# Altium PCB PCB2(binary).PcbDoc (part 2 of 2)
Units mm, origin at the board's own origin, x right, y up, seen from the top; angles counter-clockwise.
Board outline 121.9 x 82.3 mm, 2 copper layers (Top Layer, Bottom Layer); 260 components, 214 nets, 701 pads, 54 vias.
Unrouted connection lines stored in the file: 53.
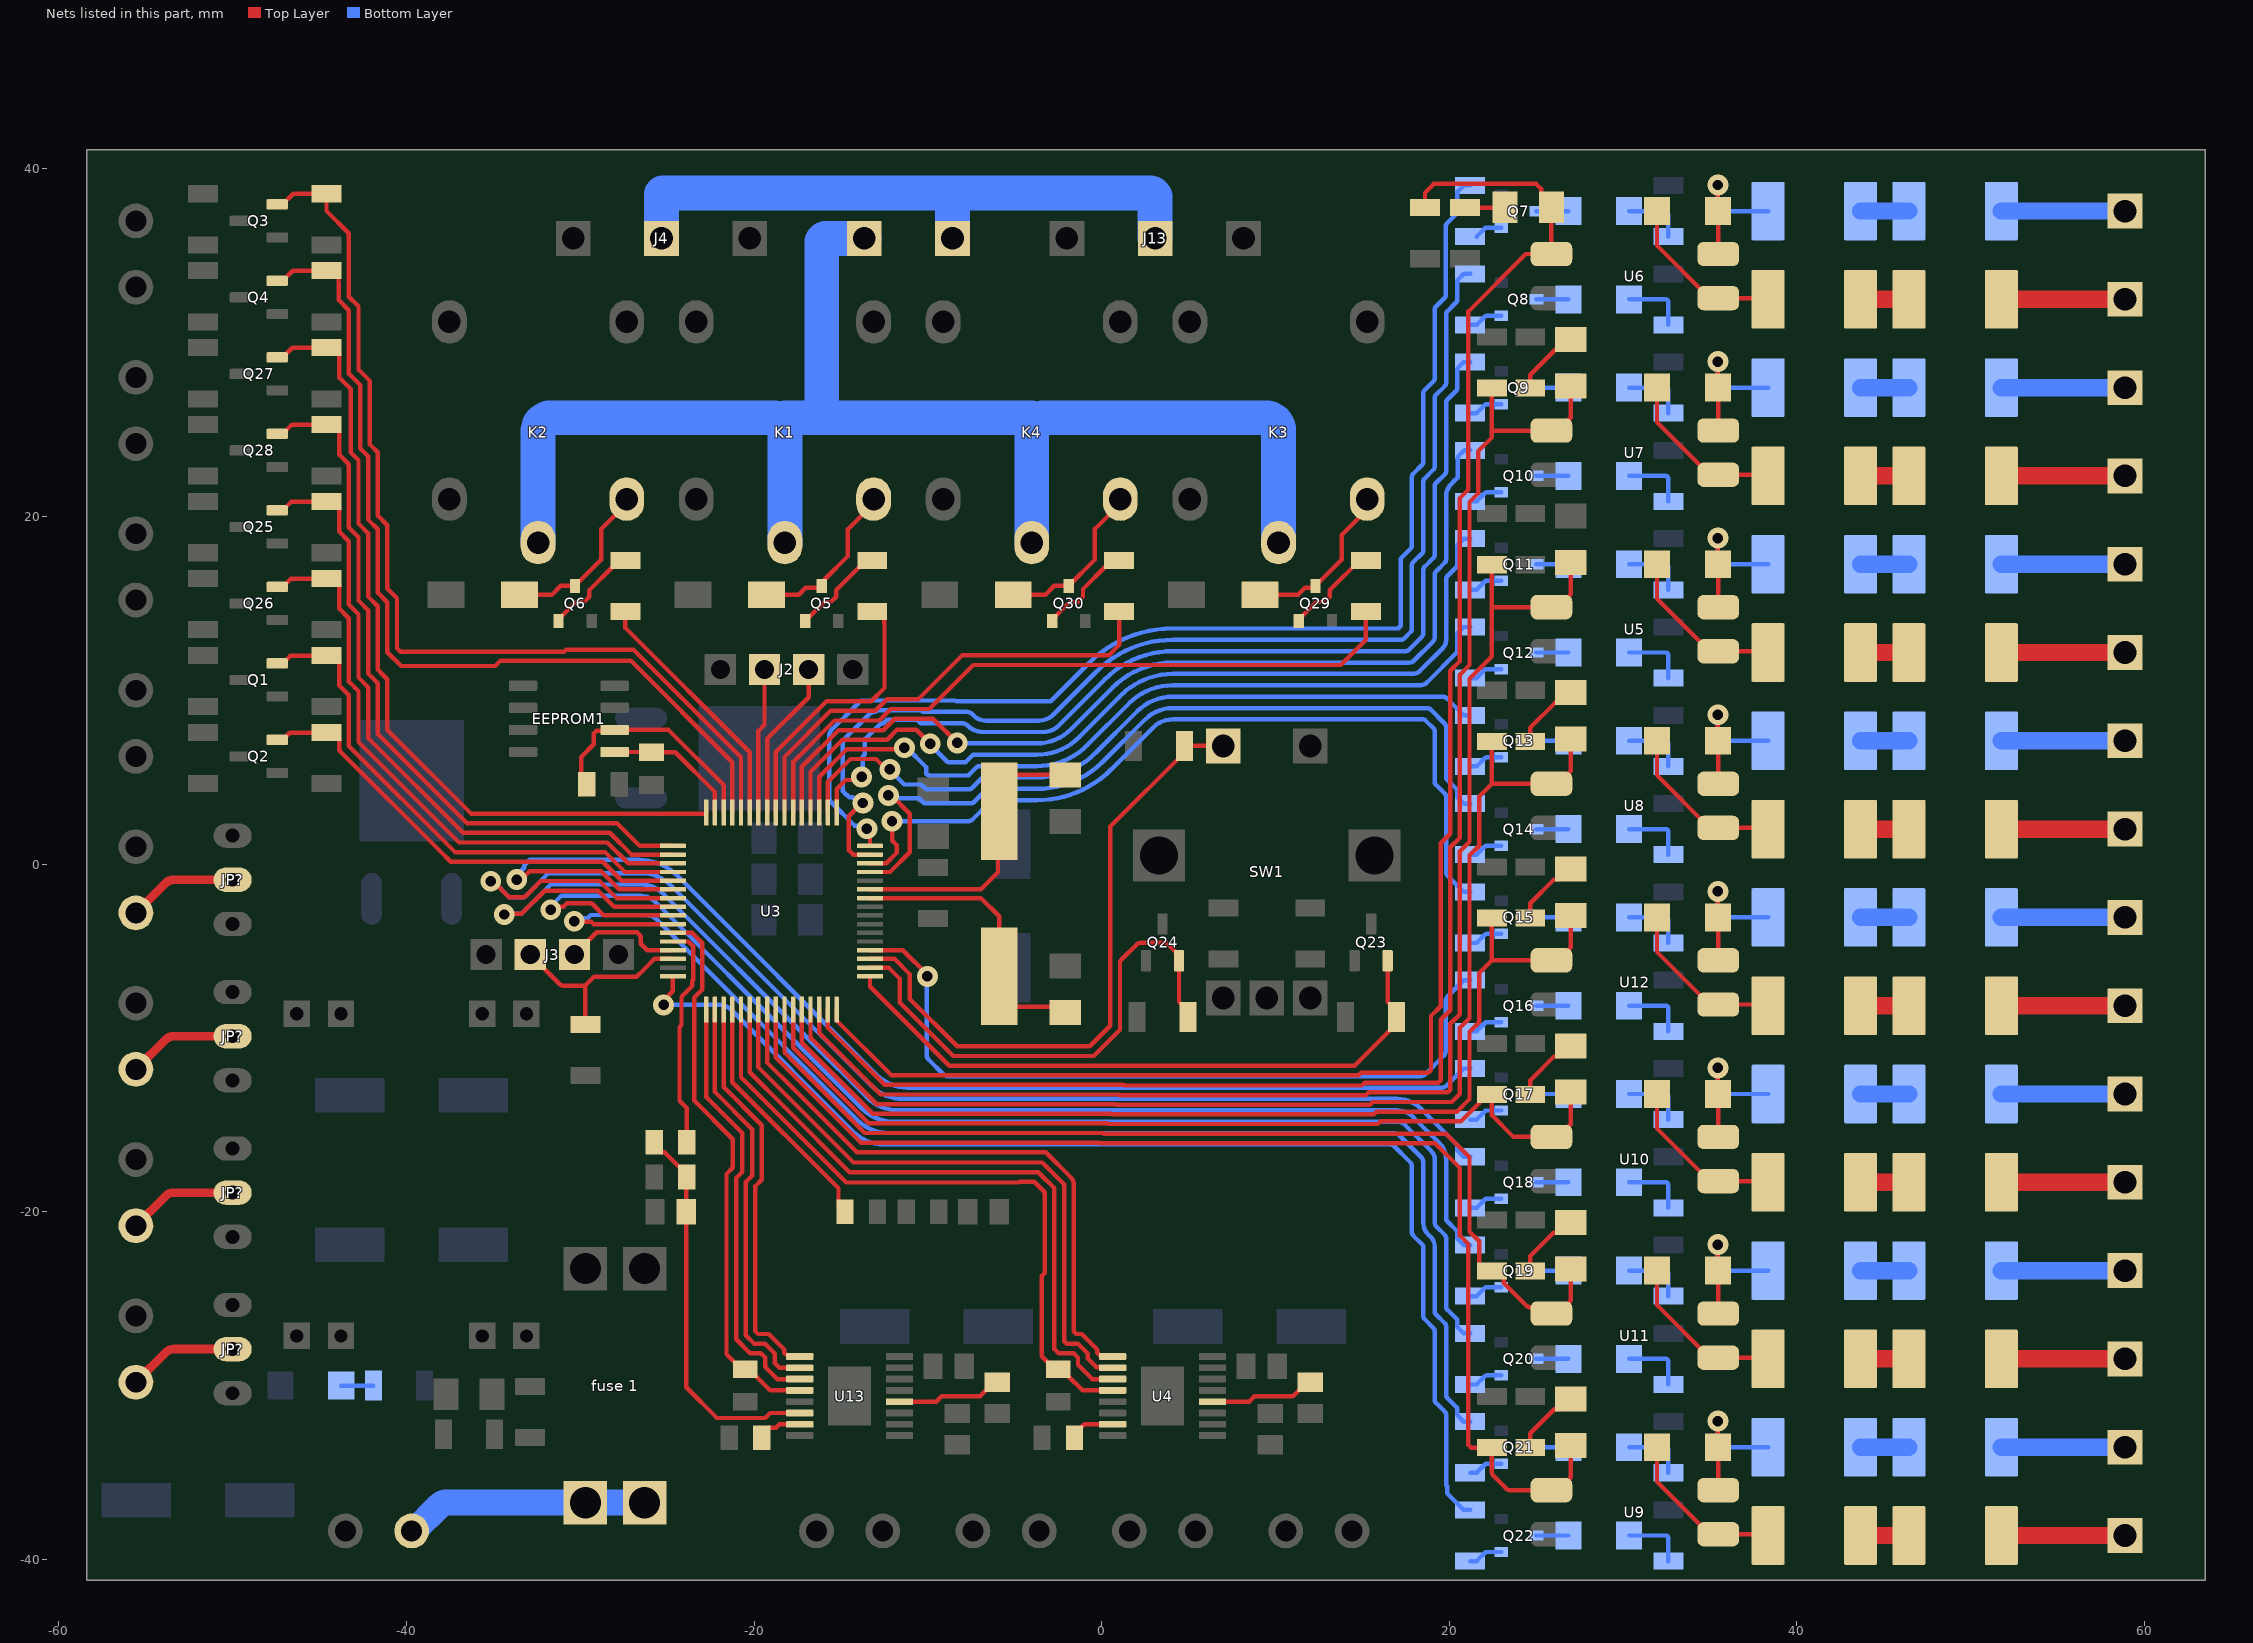
[diagram p2: the nets of this part, all layers, seen from the top]

## Via types
v1: diameter 1.2, hole 0.6, Top Layer to Bottom Layer, tented both sides, 50 vias
v2: diameter 1.2, hole 0.6, Top Layer to Bottom Layer, 4 vias

## Nets (pads, with @x,y where several pads share a name; then routed paths per layer and width w, separated by ;. In a path a pad name is that pad's centre, name@x,y a point inside that pad or via, vN(x,y) a via of type N, cw(c..) or ccw(c..) an arc to the next point about the centre after c; other vN are vias at no path point) (continued)
NetC17_2: C17.2 R67.2 U3.62 U5.3 | length 77.1
  Top Layer w0.254: U3.62@-16.25,-8.37 -16.25,-9.709 -12.706,-13.253 1.002,-13.253 1.036,-13.287 15.203,-13.287 15.36,-13.13 19.904,-13.13 20.055,-12.979 20.055,-9.189 20.609,-8.635 20.609,0.741 21.163,1.295 21.163,10.672 22.45,11.959 22.45,14.785 ; R67.2@22.45,17.225 22.45,14.785 ; C17.2@26.992,17.359 26.992,15.627 cw(c26.74,15.627) 26.918,15.449 26.328,14.859 cw(c26.15,15.037) 26.15,14.785 U5.3@25.875,14.785 22.45,14.785
NetC18_1: C18.1 R70.2 | length 2.3
  Top Layer w0.254: R70.2@20.9,37.77 23.17,37.77 C18.1@23.2,37.8
NetC18_2: C18.2 R68.2 U3.64 U6.3 | length 98.8
  Top Layer w0.254: U3.64@-15.25,-8.37 -15.25,-8.993 -12.098,-12.145 -9.005,-12.145 14.778,-12.145 14.918,-12.005 18.798,-12.005 18.947,-11.856 18.947,-8.73 19.501,-8.176 19.501,1.2 20.055,1.754 20.055,11.131 20.609,11.685 20.609,21.061 21.1,21.552 21.1,31.8 24.405,35.105 U6.3@25.875,35.105 25.875,37.797 C18.2@25.872,37.8 25.279,38.393 25.279,38.851 24.993,39.137 19.112,39.137 18.6,38.625 R68.2@18.6,37.77
NetC19_1: C19.1 R81.2 | length 3.9
  Top Layer w0.254: R81.2@24.656,27.385 24.656,28.156 26.098,29.598 26.399,29.598 C19.1@26.992,30.191
NetC19_2: C19.2 R79.2 U3.63 U7.3 | length 85.1
  Top Layer w0.254: U3.63@-15.75,-8.37 -15.75,-9.426 -12.477,-12.699 1.232,-12.699 1.266,-12.733 14.974,-12.733 15.131,-12.576 19.352,-12.576 19.501,-12.427 19.501,-8.96 20.055,-8.406 20.055,0.971 20.609,1.525 20.609,10.901 21.163,11.455 21.163,20.832 21.654,21.323 21.654,23.754 22.45,24.55 22.45,24.945 ; R79.2@22.45,27.385 22.45,24.945 ; U7.3@25.875,24.945 22.45,24.945 ; U7.3@26.254,24.945 26.992,25.683 C19.2@26.992,27.519
NetC20_1: C20.1 R82.2 | length 4
  Top Layer w0.254: R82.2@24.656,7.065 24.656,7.856 26.078,9.278 26.399,9.278 C20.1@26.992,9.871
NetC20_2: C20.2 R80.2 U3.61 U8.3 | length 68.6
  Top Layer w0.254: U3.61@-16.75,-8.37 -16.75,-9.993 -12.936,-13.807 0.773,-13.807 0.807,-13.841 15.433,-13.841 15.578,-13.696 cw(c15.607,-13.726) 15.607,-13.684 20.136,-13.684 20.609,-13.211 20.609,-9.419 21.163,-8.865 21.163,0.512 21.717,1.066 21.717,3.892 22.45,4.625 ; R80.2@22.45,7.065 22.45,4.625 ; C20.2@26.992,7.199 26.992,5.363 26.254,4.625 U8.3@25.875,4.625 22.45,4.625
NetC21_1: C21.1 R93.2 | length 4
  Top Layer w0.254: R93.2@24.656,-33.575 24.656,-32.744 26.038,-31.362 26.399,-31.362 C21.1@26.992,-30.769
NetC21_2: C21.2 R91.2 U3.57 U9.3 | length 70.8
  Top Layer w0.254: U3.57@-18.75,-8.37 -18.75,-11.126 -17.536,-12.341 -13.853,-16.023 -0.145,-16.023 -0.111,-16.057 19.182,-16.057 20.609,-17.484 20.609,-21.371 21.1,-21.862 21.1,-33.419 21.256,-33.575 22.331,-33.575 cw(c22.331,-33.694) 22.45,-33.694 22.45,-34.97 ccw(c22.763,-34.97) 22.542,-35.191 23.274,-35.923 ccw(c23.495,-35.702) 23.495,-36.015 U9.3@25.875,-36.015 26.15,-36.015 ccw(c26.15,-35.763) 26.328,-35.941 26.918,-35.351 ccw(c26.74,-35.173) 26.992,-35.173 C21.2@26.992,-33.441
NetC22_1: C22.1 R94.2 | length 4
  Top Layer w0.254: R94.2@24.656,-13.255 24.656,-12.444 26.058,-11.042 26.399,-11.042 C22.1@26.992,-10.449
NetC22_2: C22.2 R92.2 U3.59 U10.3 | length 53.4
  Top Layer w0.254: U3.59@-17.75,-8.37 -17.75,-10.559 -13.394,-14.915 0.314,-14.915 0.348,-14.949 15.892,-14.949 16.049,-14.792 20.672,-14.792 21.717,-13.747 21.717,-13.618 22.08,-13.255 R92.2@22.45,-13.255 22.45,-14.45 23.695,-15.695 26.254,-15.695 26.992,-14.957 C22.2@26.992,-13.121
NetC23_1: C23.1 R105.2 | length 4
  Top Layer w0.254: R105.2@24.656,-23.415 24.656,-22.544 25.998,-21.202 26.399,-21.202 C23.1@26.992,-20.609
NetC23_2: C23.2 R103.2 U3.58 U11.3 | length 59.5
  Top Layer w0.254: U3.58@-18.25,-8.37 -18.25,-10.843 -17.699,-11.394 -17.543,-11.55 -13.624,-15.469 0.084,-15.469 0.118,-15.503 19.803,-15.503 21.163,-16.863 21.163,-21.142 21.717,-21.696 21.717,-23.052 22.08,-23.415 22.777,-23.415 23.14,-23.778 23.14,-24.073 ccw(c23.219,-24.073) 23.164,-24.129 24.45,-25.415 ccw(c24.618,-25.247) 24.618,-25.485 25.452,-25.485 cw(c25.452,-25.611) 25.542,-25.522 25.848,-25.828 ccw(c25.913,-25.763) 25.913,-25.855 26.216,-25.855 ccw(c26.216,-25.763) 26.281,-25.828 26.918,-25.191 ccw(c26.74,-25.013) 26.992,-25.013 C23.2@26.992,-23.281
NetC24_1: C24.1 R106.2 | length 4
  Top Layer w0.254: R106.2@24.656,-3.095 24.656,-2.244 26.018,-0.882 26.399,-0.882 C24.1@26.992,-0.289
NetC24_2: C24.2 R104.2 U3.60 U12.3 | length 60
  Top Layer w0.254: U3.60@-17.25,-8.37 -17.25,-10.276 -13.165,-14.361 0.543,-14.361 0.577,-14.395 15.662,-14.395 15.819,-14.238 20.443,-14.238 21.163,-13.518 21.163,-9.648 21.717,-9.094 21.717,-6.268 22.45,-5.535 ; R104.2@22.45,-3.095 22.45,-5.535 ; C24.2@26.992,-2.961 26.992,-4.797 26.254,-5.535 U12.3@25.875,-5.535 22.45,-5.535
NetC25_2: C25.2 R111.1 R113.2 U13.6 | length 22.5
  Top Layer w0.254: R111.1@-25.735,-16 -25.735,-16.21 -25.362,-16.583 -25.152,-16.583 -24.318,-17.417 -24.238,-17.417 -23.865,-17.79 R113.2@-23.865,-18 -23.9,-18 C25.2@-23.9,-20 -23.9,-30.1 -22.137,-31.863 -19.363,-31.863 -19.075,-31.575 U13.6@-17.37,-31.575
NetD1_2: D1.2 R1.1 | length 1.9
  Bottom Layer w0.254: D1.2@-43.75,-30 R1.1@-41.9,-30
NetD2_A: D2.A K1.5 Q5.3 | length 9.6
  Top Layer w0.254: D2.A@-19.285,15.5 -17.431,15.5 -17.021,15.91 -16.2,15.91 -15.927,16.183 -15.927,16.398 -14.6,17.725 -14.6,19.275 -13.125,20.75 K1.5@-13.125,21
NetD3_A: D3.A K2.5 Q6.3 | length 9.6
  Top Layer w0.254: D3.A@-33.485,15.5 -31.631,15.5 -31.121,16.01 Q6.3@-30.3,16.01 -28.787,17.523 -28.787,19.288 -27.325,20.75 K2.5@-27.325,21
NetD4_1: D4.1 Q7.3 | length 1.8
  Bottom Layer w0.254: Q7.3@25.01,37.575 D4.1@26.85,37.575
NetD4_2: D4.2 R22.1 | length 3.6
  Bottom Layer w0.254: D4.2@30.35,37.575 32.382,37.575 cw(c32.382,37.51) 32.428,37.556 32.581,37.403 cw(c32.535,37.357) 32.6,37.357 R22.1@32.6,36.105
NetD5_1: D5.1 Q8.3 | length 1.8
  Bottom Layer w0.254: Q8.3@25.01,32.495 D5.1@26.85,32.495
NetD5_2: D5.2 R23.1 | length 3.7
  Bottom Layer w0.254: D5.2@30.35,32.495 32.453,32.495 cw(c32.453,32.348) 32.6,32.348 R23.1@32.6,31.025
NetD6_1: D6.1 Q9.3 | length 1.8
  Bottom Layer w0.254: Q9.3@25.01,27.415 D6.1@26.85,27.415
NetD6_2: D6.2 R24.1 | length 3.7
  Bottom Layer w0.254: D6.2@30.35,27.415 32.453,27.415 cw(c32.453,27.268) 32.6,27.268 R24.1@32.6,25.945
NetD7_1: D7.1 Q10.3 | length 1.8
  Bottom Layer w0.254: Q10.3@25.01,22.335 D7.1@26.85,22.335
NetD7_2: D7.2 R25.1 | length 3.7
  Bottom Layer w0.254: D7.2@30.35,22.335 32.453,22.335 cw(c32.453,22.188) 32.6,22.188 R25.1@32.6,20.865
NetD8_1: D8.1 Q11.3 | length 1.8
  Bottom Layer w0.254: Q11.3@25.01,17.255 D8.1@26.85,17.255
NetD8_2: D8.2 R26.1 | length 3.7
  Bottom Layer w0.254: D8.2@30.35,17.255 32.453,17.255 cw(c32.453,17.108) 32.6,17.108 R26.1@32.6,15.785
NetD9_1: D9.1 Q12.3 | length 1.8
  Bottom Layer w0.254: Q12.3@25.01,12.175 D9.1@26.85,12.175
NetD9_2: D9.2 R27.1 | length 3.7
  Bottom Layer w0.254: D9.2@30.35,12.175 32.453,12.175 cw(c32.453,12.028) 32.6,12.028 R27.1@32.6,10.705
NetD10_1: D10.1 Q13.3 | length 1.8
  Bottom Layer w0.254: Q13.3@25.01,7.095 D10.1@26.85,7.095
NetD10_2: D10.2 R28.1 | length 3.7
  Bottom Layer w0.254: D10.2@30.35,7.095 32.453,7.095 cw(c32.453,6.948) 32.6,6.948 R28.1@32.6,5.625
NetD11_1: D11.1 Q14.3 | length 1.8
  Bottom Layer w0.254: Q14.3@25.01,2.015 D11.1@26.85,2.015
NetD11_2: D11.2 R29.1 | length 3.7
  Bottom Layer w0.254: D11.2@30.35,2.015 32.453,2.015 cw(c32.453,1.868) 32.6,1.868 R29.1@32.6,0.545
NetD12_1: D12.1 Q15.3 | length 1.8
  Bottom Layer w0.254: Q15.3@25.01,-3.065 D12.1@26.85,-3.065
NetD12_2: D12.2 R38.1 | length 3.7
  Bottom Layer w0.254: D12.2@30.35,-3.065 32.453,-3.065 cw(c32.453,-3.212) 32.6,-3.212 R38.1@32.6,-4.535
NetD13_1: D13.1 Q16.3 | length 1.8
  Bottom Layer w0.254: Q16.3@25.01,-8.145 D13.1@26.85,-8.145
NetD13_2: D13.2 R39.1 | length 3.7
  Bottom Layer w0.254: D13.2@30.35,-8.145 32.453,-8.145 cw(c32.453,-8.292) 32.6,-8.292 R39.1@32.6,-9.615
NetD14_1: D14.1 Q17.3 | length 1.8
  Bottom Layer w0.254: Q17.3@25.01,-13.225 D14.1@26.85,-13.225
NetD14_2: D14.2 R40.1 | length 3.7
  Bottom Layer w0.254: D14.2@30.35,-13.225 32.453,-13.225 cw(c32.453,-13.372) 32.6,-13.372 R40.1@32.6,-14.695
NetD15_1: D15.1 Q18.3 | length 1.8
  Bottom Layer w0.254: Q18.3@25.01,-18.305 D15.1@26.85,-18.305
NetD15_2: D15.2 R41.1 | length 3.7
  Bottom Layer w0.254: D15.2@30.35,-18.305 32.453,-18.305 cw(c32.453,-18.452) 32.6,-18.452 R41.1@32.6,-19.775
NetD16_1: D16.1 Q19.3 | length 1.8
  Bottom Layer w0.254: Q19.3@25.01,-23.385 D16.1@26.85,-23.385
NetD16_2: D16.2 R42.1 | length 3.7
  Bottom Layer w0.254: D16.2@30.35,-23.385 32.453,-23.385 cw(c32.453,-23.532) 32.6,-23.532 R42.1@32.6,-24.855
NetD17_1: D17.1 Q20.3 | length 1.8
  Bottom Layer w0.254: Q20.3@25.01,-28.465 D17.1@26.85,-28.465
NetD17_2: D17.2 R43.1 | length 3.7
  Bottom Layer w0.254: D17.2@30.35,-28.465 32.453,-28.465 cw(c32.453,-28.612) 32.6,-28.612 R43.1@32.6,-29.935
NetD18_1: D18.1 Q21.3 | length 1.8
  Bottom Layer w0.254: Q21.3@25.01,-33.545 D18.1@26.85,-33.545
NetD18_2: D18.2 R44.1 | length 3.7
  Bottom Layer w0.254: D18.2@30.35,-33.545 32.453,-33.545 cw(c32.453,-33.692) 32.6,-33.692 R44.1@32.6,-35.015
NetD19_1: D19.1 Q22.3 | length 1.8
  Bottom Layer w0.254: Q22.3@25.01,-38.625 D19.1@26.85,-38.625
NetD19_2: D19.2 R45.1 | length 3.7
  Bottom Layer w0.254: D19.2@30.35,-38.625 32.453,-38.625 cw(c32.453,-38.772) 32.6,-38.772 R45.1@32.6,-40.095
NetD20_1: D20.1 R60.2 U5.1 | length 9.7
  Top Layer w0.254: D20.1@31.95,17.255 31.95,15.27 34.975,12.245 U5.1@35.475,12.245 38.27,12.245 R60.2@38.34,12.175
NetD20_2: D20.2 R64.2 U5.2 | length 8.3
  Top Layer w0.254: v1(35.45,18.755) D20.2@35.45,17.255 35.475,17.23 U5.2@35.475,14.785
  Bottom Layer w0.254: v1(35.45,18.755) 35.45,17.405 ccw(c35.6,17.405) 35.6,17.255 R64.2@38.34,17.255
NetD21_1: D21.1 R62.2 U6.1 | length 9.7
  Top Layer w0.254: D21.1@31.95,37.575 31.95,35.59 34.975,32.565 U6.1@35.475,32.565 38.27,32.565 R62.2@38.34,32.495
NetD21_2: D21.2 R66.2 U6.2 | length 8.3
  Top Layer w0.254: v1(35.45,39.075) D21.2@35.45,37.575 35.475,37.55 U6.2@35.475,35.105
  Bottom Layer w0.254: v1(35.45,39.075) 35.45,37.725 ccw(c35.6,37.725) 35.6,37.575 R66.2@38.34,37.575
NetD22_1: D22.1 R72.2 U7.1 | length 9.7
  Top Layer w0.254: D22.1@31.95,27.415 31.95,25.43 34.975,22.405 U7.1@35.475,22.405 38.27,22.405 R72.2@38.34,22.335
NetD22_2: D22.2 R76.2 U7.2 | length 8.3
  Top Layer w0.254: v1(35.45,28.915) D22.2@35.45,27.415 35.475,27.39 U7.2@35.475,24.945
  Bottom Layer w0.254: v1(35.45,28.915) 35.45,27.565 ccw(c35.6,27.565) 35.6,27.415 R76.2@38.34,27.415
NetD23_1: D23.1 R74.2 U8.1 | length 9.7
  Top Layer w0.254: D23.1@31.95,7.095 31.95,5.11 34.975,2.085 U8.1@35.475,2.085 38.27,2.085 R74.2@38.34,2.015
NetD23_2: D23.2 R78.2 U8.2 | length 8.3
  Top Layer w0.254: v1(35.45,8.595) D23.2@35.45,7.095 35.475,7.07 U8.2@35.475,4.625
  Bottom Layer w0.254: v1(35.45,8.595) 35.45,7.245 ccw(c35.6,7.245) 35.6,7.095 R78.2@38.34,7.095
NetD24_1: D24.1 R84.2 U9.1 | length 9.7
  Top Layer w0.254: D24.1@31.95,-33.545 31.95,-35.53 34.975,-38.555 U9.1@35.475,-38.555 38.27,-38.555 R84.2@38.34,-38.625
NetD24_2: D24.2 R88.2 U9.2 | length 8.3
  Top Layer w0.254: v1(35.45,-32.045) D24.2@35.45,-33.545 35.475,-33.57 U9.2@35.475,-36.015
  Bottom Layer w0.254: v1(35.45,-32.045) 35.45,-33.395 ccw(c35.6,-33.395) 35.6,-33.545 R88.2@38.34,-33.545
NetD25_1: D25.1 R86.2 U10.1 | length 9.7
  Top Layer w0.254: D25.1@31.95,-13.225 31.95,-15.21 34.975,-18.235 U10.1@35.475,-18.235 38.27,-18.235 R86.2@38.34,-18.305
NetD25_2: D25.2 R90.2 U10.2 | length 8.3
  Top Layer w0.254: v1(35.45,-11.725) D25.2@35.45,-13.225 35.475,-13.25 U10.2@35.475,-15.695
  Bottom Layer w0.254: v1(35.45,-11.725) 35.45,-13.075 ccw(c35.6,-13.075) 35.6,-13.225 R90.2@38.34,-13.225
NetD26_1: D26.1 R96.2 U11.1 | length 9.7
  Top Layer w0.254: D26.1@31.95,-23.385 31.95,-25.37 34.975,-28.395 U11.1@35.475,-28.395 38.27,-28.395 R96.2@38.34,-28.465
NetD26_2: D26.2 R100.2 U11.2 | length 8.3
  Top Layer w0.254: v1(35.45,-21.885) D26.2@35.45,-23.385 35.475,-23.41 U11.2@35.475,-25.855
  Bottom Layer w0.254: v1(35.45,-21.885) 35.45,-23.235 ccw(c35.6,-23.235) 35.6,-23.385 R100.2@38.34,-23.385
NetD27_1: D27.1 R98.2 U12.1 | length 9.7
  Top Layer w0.254: D27.1@31.95,-3.065 31.95,-5.05 34.975,-8.075 U12.1@35.475,-8.075 38.27,-8.075 R98.2@38.34,-8.145
NetD27_2: D27.2 R102.2 U12.2 | length 8.3
  Top Layer w0.254: v1(35.45,-1.565) D27.2@35.45,-3.065 35.475,-3.09 U12.2@35.475,-5.535
  Bottom Layer w0.254: v1(35.45,-1.565) 35.45,-2.915 ccw(c35.6,-2.915) 35.6,-3.065 R102.2@38.34,-3.065
NetD28_A: D28.A K3.5 Q29.3 | length 9.6
  Top Layer w0.254: D28.A@9.115,15.5 11.3,15.5 11.71,15.91 12.2,15.91 13.813,17.523 13.813,18.941 15.275,20.403 K3.5@15.275,21
NetD29_A: D29.A K4.5 Q30.3 | length 9.6
  Top Layer w0.254: D29.A@-5.085,15.5 -3.231,15.5 -2.721,16.01 Q30.3@-1.9,16.01 -0.387,17.523 -0.387,19.288 1.075,20.75 K4.5@1.075,21
"Netfuse 1_1": "fuse 1.1" P1.2 | length 14
  Bottom Layer w1.5: P1.2@-39.7,-38.365 -39.578,-38.365 ccw(c-39.578,-38.332) -39.555,-38.355 -38.098,-36.898 cw(c-37.704,-37.292) -37.704,-36.735 -29.7,-36.735 -26.3,-36.735
NetJ1_1: J1.1 K1.1 K2.1 K3.1 K4.1 | length 82.6
  Bottom Layer w2: K2.1@-32.425,18.5 -32.425,24.961 cw(c-31.707,24.961) -31.707,25.679 -18.943,25.679 cw(c-18.943,24.961) -18.225,24.961 K1.1@-18.225,18.5 ; -18.225,25.679 -16.316,25.679 ccw(c-16.316,25.892) -16.104,25.892 -16.104,35.756 cw(c-15.86,35.756) -15.86,36 J1.1@-13.665,36 ; -16.104,25.679 -4.025,25.679 ; K4.1@-4.025,18.5 -4.025,24.961 cw(c-3.307,24.961) -3.307,25.679 9.457,25.679 cw(c9.457,24.961) 10.175,24.961 K3.1@10.175,18.5
NetJ1_2: J1.2 J4.02 J13.02 | length 36
  Bottom Layer w2: J4.02@-25.325,36 -25.325,38.541 cw(c-25.305,38.541) -25.319,38.555 -25.272,38.602 cw(c-25.258,38.588) -25.258,38.608 -8.585,38.608 ; J1.2@-8.585,36 -8.585,38.347 cw(c-8.324,38.347) -8.324,38.608 2.814,38.608 cw(c2.814,38.347) 3.075,38.347 J13.02@3.075,36
NetJ5_1: J5.1 R63.1 | length 7.1
  Bottom Layer w1: R63.1@51.76,17.255 J5.1@58.875,17.255
NetJ5_2: J5.2 R59.1 | length 7.1
  Top Layer w1: R59.1@51.76,12.175 J5.2@58.875,12.175
NetJ6_1: J6.1 R65.1 | length 7.1
  Bottom Layer w1: R65.1@51.76,37.575 J6.1@58.875,37.575
NetJ6_2: J6.2 R61.1 | length 7.1
  Top Layer w1: R61.1@51.76,32.495 J6.2@58.875,32.495
NetJ7_1: J7.1 R75.1 | length 7.1
  Bottom Layer w1: R75.1@51.76,27.415 J7.1@58.875,27.415
NetJ7_2: J7.2 R71.1 | length 7.1
  Top Layer w1: R71.1@51.76,22.335 J7.2@58.875,22.335
NetJ8_1: J8.1 R77.1 | length 7.1
  Bottom Layer w1: R77.1@51.76,7.095 J8.1@58.875,7.095
NetJ8_2: J8.2 R73.1 | length 7.1
  Top Layer w1: R73.1@51.76,2.015 J8.2@58.875,2.015
NetJ9_1: J9.1 R87.1 | length 7.1
  Bottom Layer w1: R87.1@51.76,-33.545 J9.1@58.875,-33.545
NetJ9_2: J9.2 R83.1 | length 7.1
  Top Layer w1: R83.1@51.76,-38.625 J9.2@58.875,-38.625
NetJ10_1: J10.1 R89.1 | length 7.1
  Bottom Layer w1: R89.1@51.76,-13.225 J10.1@58.875,-13.225
NetJ10_2: J10.2 R85.1 | length 7.1
  Top Layer w1: R85.1@51.76,-18.305 J10.2@58.875,-18.305
NetJ11_1: J11.1 R99.1 | length 7.1
  Bottom Layer w1: R99.1@51.76,-23.385 J11.1@58.875,-23.385
NetJ11_2: J11.2 R95.1 | length 7.1
  Top Layer w1: R95.1@51.76,-28.465 J11.2@58.875,-28.465
NetJ12_1: J12.1 R101.1 | length 7.1
  Bottom Layer w1: R101.1@51.76,-3.065 J12.1@58.875,-3.065
NetJ12_2: J12.2 R97.1 | length 7.1
  Top Layer w1: R97.1@51.76,-8.145 J12.2@58.875,-8.145
NetQ1_2: Q1.2 R10.1 U3.36 | length 30.4
  Top Layer w0.254: Q1.2@-47.44,11.546 -47.156,11.546 ccw(c-47.156,11.622) -47.103,11.569 -46.718,11.953 cw(c-46.609,11.844) -46.609,11.999 R10.1@-44.766,11.999 ; R10.1@-44.6,11.999 -44.23,11.999 -43.867,11.636 -43.867,10.279 -43.516,9.928 -43.313,9.725 -43.313,6.804 -37.202,0.693 -28.574,0.693 -27.431,-0.45 U3.36@-24.67,-0.45
NetQ2_2: Q2.2 R11.1 U3.37 | length 26.8
  Top Layer w0.254: Q2.2@-47.44,7.145 -47.156,7.145 ccw(c-47.156,7.221) -47.103,7.167 -46.742,7.527 cw(c-46.64,7.425) -46.64,7.57 -44.23,7.57 -43.867,7.207 -43.867,6.615 ccw(c-43.708,6.615) -43.821,6.503 -38.075,0.758 -37.456,0.139 -28.708,0.139 -27.619,-0.95 U3.37@-24.67,-0.95
NetQ3_2: Q3.2 R18.1 U3.28 | length 56.4
  Top Layer w0.254: Q3.2@-47.44,37.955 -47.156,37.955 ccw(c-47.156,38.031) -47.103,37.977 -46.571,38.508 cw(c-46.423,38.36) -46.423,38.57 R18.1@-44.791,38.57 ; R18.1@-44.6,38.57 -44.6,37.584 -43.313,36.297 -43.313,32.652 -42.759,32.098 -42.759,28.453 -42.1,27.794 -42.1,24.149 -41.651,23.7 -41.651,20.054 -41.097,19.5 -41.097,15.855 -40.543,15.301 -40.543,12.422 -40.34,12.219 -30.937,12.219 -30.818,12.338 -26.937,12.338 -20.75,6.151 U3.28@-20.75,2.97
NetQ4_2: Q4.2 R19.1 U3.29 | length 52.3
  Top Layer w0.254: Q4.2@-47.44,33.554 -47.156,33.554 ccw(c-47.156,33.63) -47.103,33.576 -46.596,34.083 cw(c-46.454,33.941) -46.454,34.141 -44.273,34.141 -43.91,33.778 -43.91,33.451 -43.9,33.441 -43.9,32.455 -43.313,31.868 -43.313,28.223 -42.654,27.564 -42.654,23.919 -42.205,23.47 -42.205,19.825 -41.651,19.271 -41.651,15.626 -41.097,15.072 -41.097,12.192 -40.305,11.4 -34.896,11.4 -34.585,11.711 -27.094,11.711 -21.25,5.867 U3.29@-21.25,2.97
NetQ5_1: Q5.1 R20.1 | length 5.6
  Top Layer w0.254: Q5.1@-17.05,13.99 -17.05,14.09 -16.877,14.263 -16.777,14.263 -15.957,15.083 -15.582,15.083 -15.273,15.392 -15.273,15.767 -13.57,17.47 R20.1@-13.2,17.47
NetQ6_1: Q6.1 R21.1 | length 5.5
  Top Layer w0.254: Q6.1@-31.236,14.104 -30.257,15.083 -29.782,15.083 -29.473,15.392 -29.473,15.767 -28.133,17.107 -27.77,17.47 R21.1@-27.4,17.47
NetQ7_1: Q7.1 R30.1 | length 1.6
  Bottom Layer w0.254: R30.1@21.57,36.105 22.038,36.573 cw(c22.164,36.447) 22.164,36.625 Q7.1@22.99,36.625
NetQ8_1: Q8.1 R31.1 | length 2
  Bottom Layer w0.254: R31.1@21.2,31.025 21.533,31.025 ccw(c21.533,31.114) 21.596,31.051 22.038,31.493 cw(c22.164,31.367) 22.164,31.545 Q8.1@22.99,31.545
NetQ9_1: Q9.1 R32.1 | length 2
  Bottom Layer w0.254: R32.1@21.2,25.945 21.533,25.945 ccw(c21.533,26.034) 21.596,25.971 22.038,26.413 cw(c22.164,26.287) 22.164,26.465 Q9.1@22.99,26.465
NetQ10_1: Q10.1 R33.1 | length 2
  Bottom Layer w0.254: R33.1@21.2,20.865 21.533,20.865 ccw(c21.533,20.954) 21.596,20.891 22.038,21.333 cw(c22.164,21.207) 22.164,21.385 Q10.1@22.99,21.385
NetQ11_1: Q11.1 R34.1 | length 2
  Bottom Layer w0.254: R34.1@21.2,15.785 21.533,15.785 ccw(c21.533,15.874) 21.596,15.811 22.038,16.253 cw(c22.164,16.127) 22.164,16.305 Q11.1@22.99,16.305
NetQ12_1: Q12.1 R35.1 | length 2
  Bottom Layer w0.254: R35.1@21.2,10.705 21.533,10.705 ccw(c21.533,10.794) 21.596,10.731 22.038,11.173 cw(c22.164,11.047) 22.164,11.225 Q12.1@22.99,11.225
NetQ13_1: Q13.1 R36.1 | length 2
  Bottom Layer w0.254: R36.1@21.2,5.625 21.533,5.625 ccw(c21.533,5.714) 21.596,5.651 22.038,6.093 cw(c22.164,5.967) 22.164,6.145 Q13.1@22.99,6.145
NetQ14_1: Q14.1 R37.1 | length 2
  Bottom Layer w0.254: R37.1@21.2,0.545 21.533,0.545 ccw(c21.533,0.634) 21.596,0.571 22.038,1.013 cw(c22.164,0.887) 22.164,1.065 Q14.1@22.99,1.065
NetQ15_1: Q15.1 R46.1 | length 2
  Bottom Layer w0.254: R46.1@21.2,-4.535 21.533,-4.535 ccw(c21.533,-4.446) 21.596,-4.509 22.038,-4.067 cw(c22.164,-4.193) 22.164,-4.015 Q15.1@22.99,-4.015
NetQ16_1: Q16.1 R47.1 | length 2
  Bottom Layer w0.254: R47.1@21.2,-9.615 21.533,-9.615 ccw(c21.533,-9.526) 21.596,-9.589 22.038,-9.147 cw(c22.164,-9.273) 22.164,-9.095 Q16.1@22.99,-9.095
NetQ17_1: Q17.1 R48.1 | length 2
  Bottom Layer w0.254: R48.1@21.2,-14.695 21.533,-14.695 ccw(c21.533,-14.606) 21.596,-14.669 22.038,-14.227 cw(c22.164,-14.353) 22.164,-14.175 Q17.1@22.99,-14.175
NetQ18_1: Q18.1 R49.1 | length 2
  Bottom Layer w0.254: R49.1@21.2,-19.775 21.533,-19.775 ccw(c21.533,-19.686) 21.596,-19.749 22.038,-19.307 cw(c22.164,-19.433) 22.164,-19.255 Q18.1@22.99,-19.255
NetQ19_1: Q19.1 R50.1 | length 2
  Bottom Layer w0.254: R50.1@21.2,-24.855 21.533,-24.855 ccw(c21.533,-24.766) 21.596,-24.829 22.038,-24.387 cw(c22.164,-24.513) 22.164,-24.335 Q19.1@22.99,-24.335
NetQ20_1: Q20.1 R51.1 | length 2
  Bottom Layer w0.254: R51.1@21.2,-29.935 21.533,-29.935 ccw(c21.533,-29.846) 21.596,-29.909 22.038,-29.467 cw(c22.164,-29.593) 22.164,-29.415 Q20.1@22.99,-29.415
NetQ21_1: Q21.1 R52.1 | length 2
  Bottom Layer w0.254: R52.1@21.2,-35.015 21.533,-35.015 ccw(c21.533,-34.926) 21.596,-34.989 22.038,-34.547 cw(c22.164,-34.673) 22.164,-34.495 Q21.1@22.99,-34.495
NetQ22_1: Q22.1 R53.1 | length 2
  Bottom Layer w0.254: R53.1@21.2,-40.095 21.533,-40.095 ccw(c21.533,-40.006) 21.596,-40.069 22.038,-39.627 cw(c22.164,-39.753) 22.164,-39.575 Q22.1@22.99,-39.575
NetQ23_2: Q23.2 R57.2 U3.1 | length 37.2
  Top Layer w0.254: U3.1@-13.33,-6.45 -13.33,-7.037 -13.31,-7.057 -8.776,-11.591 14.549,-11.591 16.97,-9.17 R57.2@16.97,-8.8 ; Q23.2@16.45,-5.56 16.45,-7.91 R57.2@16.97,-8.43
NetQ24_2: Q24.2 R58.1 U3.2 | length 29.7
  Top Layer w0.254: U3.2@-13.33,-5.95 -12.262,-5.95 -11.608,-6.604 -11.608,-7.976 -8.546,-11.037 -0.452,-11.037 1.054,-9.531 1.054,-5.581 1.16,-5.475 2.011,-4.624 cw(c2.267,-4.881) 2.267,-4.518 3.62,-4.518 cw(c3.62,-4.766) 3.796,-4.591 4.45,-5.245 4.45,-7.91 4.97,-8.43 R58.1@4.97,-8.8
NetQ25_2: Q25.2 R109.1 U3.34 | length 38.1
  Top Layer w0.254: Q25.2@-47.44,20.349 -47.156,20.349 ccw(c-47.156,20.425) -47.103,20.372 -46.669,20.805 cw(c-46.547,20.683) -46.547,20.856 R109.1@-44.705,20.856 ; R109.1@-44.6,20.856 -44.23,20.856 -43.867,20.493 -43.867,19.137 -43.313,18.583 -43.313,14.937 -42.759,14.383 -42.759,10.738 -42.408,10.387 -42.205,10.184 -42.205,7.262 -36.744,1.801 -28.305,1.801 -27.055,0.55 U3.34@-24.67,0.55
NetQ26_2: Q26.2 R110.1 U3.35 | length 34.4
  Top Layer w0.254: Q26.2@-47.44,15.948 -47.125,15.948 -46.646,16.427 -44.23,16.427 -43.867,16.064 -43.867,14.708 -43.313,14.154 -43.313,10.509 -42.962,10.158 -42.759,9.955 -42.759,7.033 -36.973,1.247 -28.44,1.247 -27.243,0.05 U3.35@-24.67,0.05
NetQ27_2: Q27.2 R117.1 U3.32 | length 47.1
  Top Layer w0.254: Q27.2@-47.44,29.152 -47.156,29.152 ccw(c-47.156,29.228) -47.103,29.174 -46.62,29.657 cw(c-46.485,29.521) -46.485,29.713 -44.23,29.713 -43.867,29.35 -43.867,27.994 -43.208,27.335 -43.208,23.69 -42.759,23.241 -42.759,19.596 -42.205,19.042 -42.205,15.396 -41.651,14.842 -41.651,11.197 -41.3,10.846 -41.097,10.643 -41.097,7.721 -36.285,2.909 -27.109,2.909 -27.1,2.9 -22.75,2.9 U3.32@-22.75,2.97
NetQ28_2: Q28.2 R118.1 U3.33 | length 41.8
  Top Layer w0.254: Q28.2@-47.44,24.751 -47.156,24.751 ccw(c-47.156,24.827) -47.103,24.773 -46.645,25.231 cw(c-46.516,25.102) -46.516,25.284 R118.1@-44.763,25.284 ; R118.1@-44.6,25.284 -44.23,25.284 -43.867,24.921 -43.867,23.565 -43.313,23.011 -43.313,19.366 -42.759,18.812 -42.759,15.167 -42.205,14.613 -42.205,10.968 -41.854,10.617 -41.651,10.414 -41.651,7.492 -36.514,2.355 -27.883,2.355 -26.578,1.05 U3.33@-24.67,1.05
NetQ29_1: Q29.1 R119.1 | length 5.5
  Top Layer w0.254: Q29.1@11.364,14.104 12.343,15.083 12.818,15.083 13.127,15.392 13.127,15.767 14.83,17.47 R119.1@15.2,17.47
NetQ30_1: Q30.1 R120.1 | length 5.6
  Top Layer w0.254: Q30.1@-2.85,13.99 -2.85,14.09 -2.677,14.263 -2.659,14.263 -1.839,15.083 -1.382,15.083 -1.073,15.392 -1.073,15.827 0.207,17.107 0.637,17.107 R120.1@1,17.47
NetR12_2: R12.2 U3.52 | length 14.3
  Top Layer w0.254: U3.52@-21.25,-8.37 -21.25,-12.544 -15.143,-18.651 -15.143,-19.627 R12.2@-14.77,-20
NetR13_1: R13.1 U4.7 | length 2.6
  Top Layer w0.254: R13.1@-1.565,-33 -1.565,-32.811 cw(c-1.514,-32.811) -1.55,-32.775 -1.057,-32.282 cw(c-0.92,-32.418) -0.92,-32.225 U4.7@0.63,-32.225
NetR15_1: R15.1 U3.53 U4.4 | length 38.5
  Top Layer w0.254: U3.53@-20.75,-8.37 -20.75,-12.26 -14.694,-18.316 -4.768,-18.316 -4.725,-18.273 -3.875,-18.273 -3.273,-18.875 -3.273,-23.519 -3.425,-23.671 ccw(c-3.384,-23.712) -3.442,-23.712 -3.442,-28.229 ccw(c-3.192,-28.229) -3.369,-28.406 -2.74,-29.035 ccw(c-2.668,-28.964) -2.668,-29.065 -2.29,-29.065 -1.917,-29.438 -1.917,-29.461 -1.103,-30.275 U4.4@0.63,-30.275
NetR20_2: R20.2 U3.24 | length 16.1
  Top Layer w0.254: U3.24@-18.75,2.97 -18.75,6.449 -15.826,9.373 -13.259,9.373 -12.497,10.135 -12.497,13.827 -12.51,13.84 -12.51,14.167 -12.873,14.53 R20.2@-13.2,14.53
NetR21_2: R21.2 U3.27 | length 14.5
  Top Layer w0.254: R21.2@-27.4,14.53 -27.4,13.584 -20.25,6.434 U3.27@-20.25,2.97
NetR30_2: R30.2 U3.16 | length 70
  Top Layer w0.254: v1(-13.51,2.038) -13.33,1.858 U3.16@-13.33,1.062
  Bottom Layer w0.254: v1(-13.51,2.038) -13.691,2.219 -14.219,2.219 -15.536,3.536 cw(c-15.204,3.867) -15.673,3.867 -15.673,7.344 cw(c-15.054,7.344) -15.492,7.781 -14.041,9.232 -13.859,9.414 -8.415,9.414 -8.373,9.372 -2.928,9.372 -0.738,11.562 cw(c4.084,6.739) 4.084,13.559 17.027,13.559 ccw(c17.027,13.61) 17.063,13.574 17.182,13.693 ccw(c17.146,13.729) 17.197,13.729 17.197,17.484 cw(c17.42,17.484) 17.262,17.642 17.786,18.165 ccw(c17.628,18.323) 17.851,18.323 17.851,22.293 cw(c18.074,22.293) 17.916,22.451 18.44,22.975 ccw(c18.282,23.132) 18.505,23.132 18.505,27.103 cw(c18.728,27.103) 18.57,27.26 19.094,27.784 ccw(c18.936,27.942) 19.159,27.942 19.159,31.914 cw(c19.378,31.914) 19.223,32.068 19.736,32.581 ccw(c19.581,32.736) 19.8,32.736 19.8,36.706 cw(c20.028,36.706) 19.867,36.867 20.4,37.401 ccw(c20.239,37.562) 20.467,37.562 20.467,38.631 cw(c20.591,38.631) 20.503,38.718 20.804,39.019 cw(c20.867,38.956) 20.867,39.045 R30.2@21.2,39.045
NetR31_2: R31.2 U3.15 | length 66.2
  Top Layer w0.254: v1(-13.741,3.52) -13.795,3.52 -14.554,2.762 -14.554,0.811 -14.292,0.55 U3.15@-13.33,0.55
  Bottom Layer w0.254: v1(-13.741,3.52) -13.997,3.52 -14.318,3.841 -14.513,3.841 -14.672,4 cw(c-14.672,4.068) -14.72,4.02 -14.88,4.18 cw(c-14.832,4.228) -14.9,4.228 -14.9,6.865 cw(c-14.333,6.865) -14.734,7.266 -13.407,8.593 cw(c-13.006,8.193) -13.006,8.759 -12.905,8.86 -10.389,8.86 -10.289,8.759 -7.773,8.759 cw(c-7.773,8.277) -7.431,8.618 -7.347,8.534 ccw(c-6.673,9.208) -6.673,8.255 -3.633,8.255 ccw(c-3.633,9.494) -2.757,8.618 -0.276,11.099 cw(c4.084,6.739) 4.084,12.905 17.244,12.905 ccw(c17.244,13.087) 17.372,12.958 17.798,13.384 ccw(c17.669,13.512) 17.851,13.512 17.851,17.213 cw(c18.074,17.213) 17.916,17.371 18.44,17.895 ccw(c18.282,18.052) 18.505,18.052 18.505,22.023 cw(c18.728,22.023) 18.57,22.18 19.094,22.704 ccw(c18.936,22.862) 19.159,22.862 19.159,26.832 cw(c19.382,26.832) 19.224,26.99 19.748,27.513 ccw(c19.59,27.671) 19.813,27.671 19.813,31.641 cw(c20.036,31.641) 19.878,31.799 20.402,32.322 ccw(c20.244,32.48) 20.467,32.48 20.467,33.551 cw(c20.591,33.551) 20.503,33.638 20.804,33.939 cw(c20.867,33.876) 20.867,33.965 R31.2@21.2,33.965
NetR32_2: R32.2 U3.17 | length 57.1
  Top Layer w0.254: U3.17@-15.25,2.97 -15.25,4.308 -14.717,4.841 -13.997,4.841 v1(-13.816,5.022)
  Bottom Layer w0.254: v1(-13.816,5.022) -13.752,5.085 -13.752,6.183 -13.625,6.31 -13.625,7.175 -12.798,8.002 cw(c-12.548,7.752) -12.548,8.105 -12.348,8.306 -10.619,8.306 -10.418,8.105 -8.043,8.105 cw(c-8.043,7.623) -7.702,7.964 ccw(c-6.826,8.84) -6.826,7.601 -3.363,7.601 ccw(c-3.363,8.84) -2.486,7.964 0.186,10.637 cw(c4.084,6.739) 4.084,12.251 17.461,12.251 ccw(c17.461,12.563) 17.682,12.342 18.414,13.074 ccw(c18.193,13.295) 18.505,13.295 18.505,16.943 cw(c18.728,16.943) 18.57,17.1 19.094,17.624 ccw(c18.936,17.782) 19.159,17.782 19.159,21.752 cw(c19.382,21.752) 19.224,21.91 19.748,22.433 ccw(c19.59,22.591) 19.813,22.591 19.813,26.561 cw(c20.036,26.561) 19.878,26.719 20.402,27.242 ccw(c20.244,27.4) 20.467,27.4 20.467,28.471 cw(c20.591,28.471) 20.503,28.558 20.804,28.859 cw(c20.867,28.796) 20.867,28.885 R32.2@21.2,28.885
NetR33_2: R33.2 U3.21 | length 54.8
  Top Layer w0.254: U3.21@-17.25,2.97 -17.25,5.598 -15.138,7.711 -12.57,7.711 -11.91,8.371 -9.703,8.371 v1(-8.31,6.978)
  Bottom Layer w0.254: v1(-8.31,6.978) -8.282,6.95 ccw(c-8.275,6.958) -8.275,6.947 -3.732,6.947 ccw(c-3.732,9.731) -1.763,7.763 0.649,10.174 cw(c4.084,6.739) 4.084,11.597 17.677,11.597 ccw(c17.677,12.04) 17.991,11.727 19.029,12.765 ccw(c18.716,13.079) 19.159,13.079 19.159,16.672 cw(c19.382,16.672) 19.224,16.83 19.748,17.353 ccw(c19.59,17.511) 19.813,17.511 19.813,21.158 cw(c20.816,21.158) 20.107,21.867 20.262,22.022 20.472,22.232 ccw(c20.416,22.289) 20.495,22.289 20.495,23.391 cw(c20.619,23.391) 20.532,23.478 20.834,23.781 cw(c20.893,23.723) 20.893,23.805 R33.2@21.2,23.805
NetR34_2: R34.2 U3.20 | length 50
  Top Layer w0.254: U3.20@-16.75,2.97 -16.75,5.315 -14.908,7.157 -12.341,7.157 -11.772,7.725 -10.661,7.725 v1(-9.864,6.929)
  Bottom Layer w0.254: v1(-9.864,6.929) -9.864,6.877 -8.909,5.922 ccw(c-8.739,6.092) -8.739,5.851 -7.906,5.851 ccw(c-7.906,6.002) -7.799,5.896 -7.446,6.249 cw(c-7.339,6.142) -7.339,6.293 -3.732,6.293 ccw(c-3.732,9.731) -1.3,7.3 1.111,9.712 cw(c4.084,6.739) 4.084,10.943 17.894,10.943 ccw(c17.894,11.517) 18.3,11.111 19.645,12.456 ccw(c19.239,12.862) 19.813,12.862 19.813,16.401 cw(c20.036,16.401) 19.878,16.559 20.402,17.082 ccw(c20.244,17.24) 20.467,17.24 20.467,18.311 cw(c20.591,18.311) 20.503,18.398 20.804,18.699 cw(c20.867,18.636) 20.867,18.725 R34.2@21.2,18.725
NetR35_2: R35.2 U3.19 | length 44.9
  Top Layer w0.254: U3.19@-16.25,2.97 -16.25,5.031 -14.679,6.603 -11.443,6.603 v1(-11.347,6.698)
  Bottom Layer w0.254: v1(-11.347,6.698) -11.211,6.698 -10.104,5.591 -10.104,5.204 ccw(c-9.853,5.454) -9.853,5.1 -7.746,5.1 ccw(c-7.746,5.284) -7.616,5.154 -7.185,5.585 cw(c-7.055,5.455) -7.055,5.639 -3.732,5.639 ccw(c-3.732,9.731) -0.838,6.838 1.574,9.249 cw(c4.084,6.739) 4.084,10.289 18.281,10.289 ccw(c18.281,10.943) 18.743,10.481 20.391,12.128 ccw(c20.207,12.312) 20.467,12.312 20.467,13.231 cw(c20.591,13.231) 20.503,13.318 20.804,13.619 cw(c20.867,13.556) 20.867,13.645 R35.2@21.2,13.645
NetR36_2: R36.2 U3.18 | length 42.1
  Top Layer w0.254: U3.18@-15.75,2.97 -15.75,4.748 -14.449,6.049 -12.981,6.049 -12.388,5.456 v1(-12.187,5.456)
  Bottom Layer w0.254: v1(-12.187,5.456) -12.187,5.405 -11.365,4.584 -10.428,4.584 cw(c-10.428,4.537) -10.395,4.57 -10.274,4.45 ccw(c-10.266,4.458) -10.266,4.446 -10.226,4.446 cw(c-10.226,4.434) -10.218,4.442 -10.09,4.315 ccw(c-10.054,4.35) -10.054,4.3 -7.642,4.3 ccw(c-7.642,4.534) -7.477,4.368 -6.929,4.917 cw(c-6.763,4.751) -6.763,4.985 -3.732,4.985 ccw(c-3.732,9.731) -0.375,6.375 2.036,8.787 cw(c4.084,6.739) 4.084,9.635 19.609,9.635 cw(c19.609,9.27) 19.867,9.528 20.817,8.578 ccw(c20.849,8.61) 20.849,8.565 R36.2@21.015,8.565
NetR37_2: R37.2 U3.13 | length 46.5
  Top Layer w0.254: U3.13@-13.33,-0.45 -12.178,-0.45 -11.037,0.691 -11.037,2.9 -12.095,3.958 v1(-12.269,3.958)
  Bottom Layer w0.254: v1(-12.269,3.958) -12.103,3.792 -10.533,3.792 cw(c-10.533,3.692) -10.463,3.763 -10.229,3.529 ccw(c-10.159,3.6) -10.159,3.5 -7.538,3.5 ccw(c-7.538,3.784) -7.337,3.583 -6.672,4.248 cw(c-6.472,4.047) -6.472,4.331 -3.732,4.331 ccw(c-3.732,9.731) 0.087,5.913 2.499,8.324 cw(c4.084,6.739) 4.084,8.981 18.707,8.981 cw(c18.707,8.65) 18.941,8.884 19.716,8.109 cw(c19.482,7.875) 19.813,7.875 19.813,5.009 ccw(c20.036,5.009) 19.878,4.851 20.438,4.292 cw(c20.367,4.221) 20.467,4.221 20.467,3.889 ccw(c20.567,3.889) 20.496,3.819 20.804,3.511 ccw(c20.867,3.574) 20.867,3.485 R37.2@21.2,3.485
NetR46_2: R46.2 U3.14 | length 47.6
  Top Layer w0.254: U3.14@-13.33,0.05 -12.396,0.05 -12.358,0.088 -11.8,0.646 -11.8,1.1 -12.051,1.351 -12.051,2.459 v1(-12.064,2.472)
  Bottom Layer w0.254: v1(-12.064,2.472) -12.062,2.474 -7.691,2.474 ccw(c-7.691,2.885) -7.401,2.594 -6.439,3.557 cw(c-6.148,3.266) -6.148,3.677 -3.732,3.677 ccw(c-3.732,9.731) 0.549,5.45 2.961,7.862 cw(c4.084,6.739) 4.084,8.327 18.49,8.327 cw(c18.49,8.127) 18.632,8.268 19.1,7.8 cw(c18.959,7.658) 19.159,7.658 19.159,4.738 ccw(c19.382,4.738) 19.224,4.58 19.748,4.057 cw(c19.59,3.899) 19.813,3.899 19.813,-0.434 ccw(c20.16,-0.434) 19.915,-0.68 20.804,-1.569 ccw(c20.867,-1.506) 20.867,-1.595 R46.2@21.2,-1.595
NetR47_2: R47.2 U3.4 | length 44.5
  Top Layer w0.254: U3.4@-13.33,-4.95 -11.441,-4.95 -10.027,-6.364 v1(-10.027,-6.458)
  Bottom Layer w0.254: v1(-10.027,-6.458) -10.066,-6.497 -10.066,-10.989 ccw(c-9.704,-10.989) -9.96,-11.245 -9.111,-12.094 ccw(c-8.855,-11.838) -8.855,-12.2 18.329,-12.2 ccw(c18.329,-11.76) 18.64,-12.071 19.671,-11.04 ccw(c19.36,-10.729) 19.8,-10.729 19.8,-7.855 cw(c20.153,-7.855) 19.903,-7.606 20.804,-6.701 cw(c20.867,-6.764) 20.867,-6.675 R47.2@21.2,-6.675
NetR48_2: R48.2 U3.38 | length 70.8
  Top Layer w0.254: v1(-33.649,-0.888) -33.393,-0.888 -32.92,-0.415 -28.802,-0.415 -27.767,-1.45 U3.38@-24.67,-1.45
  Bottom Layer w0.254: v1(-33.649,-0.888) -33.649,-0.632 -33.221,-0.204 -33.221,-0.063 -32.908,0.25 -26.646,0.25 cw(c-26.646,-2.938) -24.392,-0.684 -12.965,-12.11 ccw(c-11.169,-10.314) -11.169,-12.854 19.576,-12.854 ccw(c19.576,-12.479) 19.841,-12.744 20.804,-11.781 cw(c20.867,-11.844) 20.867,-11.755 R48.2@21.2,-11.755
NetR49_2: R49.2 U3.39 | length 75.6
  Top Layer w0.254: v1(-35.146,-0.98) -35.023,-0.98 cw(c-35.023,-1.014) -34.999,-0.99 -34.134,-1.855 ccw(c-33.989,-1.71) -33.989,-1.915 -33.309,-1.915 ccw(c-33.309,-1.71) -33.163,-1.855 -32.277,-0.969 -28.89,-0.969 -27.909,-1.95 U3.39@-24.67,-1.95
  Bottom Layer w0.254: v1(-35.146,-0.98) -35.009,-0.98 -34.074,-1.915 -33.223,-1.915 -31.823,-0.515 -26.535,-0.515 cw(c-26.535,-3.049) -24.743,-1.257 -16.089,-9.912 -13.236,-12.764 ccw(c-11.44,-10.968) -11.44,-13.508 16.997,-13.508 cw(c16.997,-15.463) 18.379,-14.081 20.446,-16.147 cw(c20.394,-16.199) 20.467,-16.199 20.467,-16.442 ccw(c20.54,-16.442) 20.488,-16.493 20.804,-16.809 ccw(c20.867,-16.746) 20.867,-16.835 R49.2@21.2,-16.835
NetR50_2: R50.2 U3.40 | length 77.8
  Top Layer w0.254: v1(-34.371,-2.898) -34.341,-2.868 cw(c-34.334,-2.876) -34.334,-2.865 -33.485,-2.865 ccw(c-33.485,-2.636) -33.323,-2.798 -32.048,-1.523 -28.978,-1.523 -28.051,-2.45 U3.40@-24.67,-2.45
  Bottom Layer w0.254: v1(-34.371,-2.898) -34.338,-2.865 -33.39,-2.865 -31.694,-1.169 -26.535,-1.169 cw(c-26.535,-3.049) -25.206,-1.72 -16.743,-10.183 -13.507,-13.418 ccw(c-11.711,-11.622) -11.711,-14.162 16.997,-14.162 cw(c16.997,-15.463) 17.917,-14.543 19.432,-16.058 cw(c18.512,-16.978) 19.813,-16.978 19.813,-20.391 ccw(c20.036,-20.391) 19.878,-20.549 20.438,-21.108 cw(c20.367,-21.179) 20.467,-21.179 20.467,-21.511 ccw(c20.567,-21.511) 20.496,-21.581 20.804,-21.889 ccw(c20.867,-21.826) 20.867,-21.915 R50.2@21.2,-21.915
NetR51_2: R51.2 U3.41 | length 76
  Top Layer w0.254: v1(-31.694,-2.621) -31.513,-2.44 -30.958,-2.44 -30.779,-2.261 cw(c-30.731,-2.309) -30.731,-2.241 -29.459,-2.241 cw(c-29.459,-2.483) -29.288,-2.312 -28.65,-2.95 U3.41@-24.67,-2.95
  Bottom Layer w0.254: v1(-31.694,-2.621) -31.694,-2.412 -31.167,-1.885 cw(c-31.016,-2.036) -31.016,-1.823 -26.535,-1.823 cw(c-26.535,-3.049) -25.668,-2.182 -17.397,-10.453 -13.778,-14.072 ccw(c-11.982,-12.276) -11.982,-14.816 16.997,-14.816 cw(c16.997,-15.463) 17.454,-15.005 18.97,-16.521 cw(c18.512,-16.978) 19.159,-16.978 19.159,-20.621 ccw(c19.481,-20.621) 19.253,-20.849 19.748,-21.343 cw(c19.59,-21.501) 19.813,-21.501 19.813,-25.471 ccw(c20.036,-25.471) 19.878,-25.629 20.438,-26.188 cw(c20.367,-26.259) 20.467,-26.259 20.467,-26.591 ccw(c20.567,-26.591) 20.496,-26.661 20.804,-26.969 ccw(c20.867,-26.906) 20.867,-26.995 R51.2@21.2,-26.995
NetR52_2: R52.2 U3.42 | length 76.7
  Top Layer w0.254: v1(-30.347,-3.281) -30.305,-3.323 -29.366,-3.323 -29.239,-3.45 U3.42@-24.67,-3.45
  Bottom Layer w0.254: v1(-30.347,-3.281) -30.166,-3.1 -29.565,-3.1 -29.392,-2.927 -26.285,-2.927 cw(c-26.285,-3.982) -25.539,-3.236 -14.049,-14.726 ccw(c-12.253,-12.93) -12.253,-15.47 16.78,-15.47 cw(c16.78,-15.986) 17.145,-15.621 18.354,-16.83 cw(c17.989,-17.195) 18.505,-17.195 18.505,-20.621 ccw(c19.481,-20.621) 18.791,-21.311 18.931,-21.451 cw(c18.381,-22.002) 19.159,-22.002 19.159,-25.742 ccw(c19.382,-25.742) 19.224,-25.9 19.748,-26.423 cw(c19.59,-26.581) 19.813,-26.581 19.813,-30.551 ccw(c20.036,-30.551) 19.878,-30.709 20.438,-31.268 cw(c20.367,-31.339) 20.467,-31.339 20.467,-31.671 ccw(c20.567,-31.671) 20.496,-31.741 20.804,-32.049 ccw(c20.867,-31.986) 20.867,-32.075 R52.2@21.2,-32.075
NetR53_2: R53.2 U3.48 | length 70
  Top Layer w0.254: v1(-25.2,-8.1) -25.2,-7.844 -24.67,-7.314 U3.48@-24.67,-6.45
  Bottom Layer w0.254: v1(-25.2,-8.1) -21.96,-8.1 cw(c-21.96,-8.969) -21.345,-8.355 -14.32,-15.38 ccw(c-12.524,-13.584) -12.524,-16.124 16.563,-16.124 cw(c16.563,-16.509) 16.836,-16.237 17.738,-17.139 cw(c17.466,-17.412) 17.851,-17.412 17.851,-21.203 ccw(c18.074,-21.203) 17.916,-21.361 18.44,-21.885 cw(c18.282,-22.042) 18.505,-22.042 18.505,-26.013 ccw(c18.728,-26.013) 18.57,-26.17 19.094,-26.694 cw(c18.936,-26.852) 19.159,-26.852 19.159,-30.822 ccw(c19.382,-30.822) 19.224,-30.98 19.748,-31.503 cw(c19.59,-31.661) 19.813,-31.661 19.813,-35.714 ccw(c19.835,-35.714) 19.819,-35.73 19.871,-35.781 cw(c19.855,-35.796) 19.877,-35.796 19.877,-36.161 ccw(c19.977,-36.161) 19.906,-36.231 20.804,-37.129 ccw(c20.867,-37.066) 20.867,-37.155 R53.2@21.2,-37.155
NetR54_1: R54.1 SW1.4 U3.3 | length 37.3
  Top Layer w0.254: U3.3@-13.33,-5.45 -11.924,-5.45 -11.054,-6.32 -11.054,-7.746 -8.317,-10.483 -0.682,-10.483 0.5,-9.301 0.5,2.16 4.77,6.43 R54.1@4.77,6.8 SW1.4@7,6.8
NetR59_2: R59.2 R60.1 | length 2.8
  Top Layer w1: R60.1@43.66,12.175 R59.2@46.44,12.175
NetR61_2: R61.2 R62.1 | length 2.8
  Top Layer w1: R62.1@43.66,32.495 R61.2@46.44,32.495
NetR63_2: R63.2 R64.1 | length 2.8
  Bottom Layer w1: R64.1@43.66,17.255 R63.2@46.44,17.255
NetR65_2: R65.2 R66.1 | length 2.8
  Bottom Layer w1: R66.1@43.66,37.575 R65.2@46.44,37.575
NetR71_2: R71.2 R72.1 | length 2.8
  Top Layer w1: R72.1@43.66,22.335 R71.2@46.44,22.335
NetR73_2: R73.2 R74.1 | length 2.8
  Top Layer w1: R74.1@43.66,2.015 R73.2@46.44,2.015
NetR75_2: R75.2 R76.1 | length 2.8
  Bottom Layer w1: R76.1@43.66,27.415 R75.2@46.44,27.415
NetR77_2: R77.2 R78.1 | length 2.8
  Bottom Layer w1: R78.1@43.66,7.095 R77.2@46.44,7.095
NetR83_2: R83.2 R84.1 | length 2.8
  Top Layer w1: R84.1@43.66,-38.625 R83.2@46.44,-38.625
NetR85_2: R85.2 R86.1 | length 2.8
  Top Layer w1: R86.1@43.66,-18.305 R85.2@46.44,-18.305
NetR87_2: R87.2 R88.1 | length 2.8
  Bottom Layer w1: R88.1@43.66,-33.545 R87.2@46.44,-33.545
NetR89_2: R89.2 R90.1 | length 2.8
  Bottom Layer w1: R90.1@43.66,-13.225 R89.2@46.44,-13.225
NetR95_2: R95.2 R96.1 | length 2.8
  Top Layer w1: R96.1@43.66,-28.465 R95.2@46.44,-28.465
NetR97_2: R97.2 R98.1 | length 2.8
  Top Layer w1: R98.1@43.66,-8.145 R97.2@46.44,-8.145
NetR99_2: R99.2 R100.1 | length 2.8
  Bottom Layer w1: R100.1@43.66,-23.385 R99.2@46.44,-23.385
NetR101_2: R101.2 R102.1 | length 2.8
  Bottom Layer w1: R102.1@43.66,-3.065 R101.2@46.44,-3.065
NetR111_2: R111.2 U3.44 | length 13.1
  Top Layer w0.254: U3.44@-24.67,-4.45 -23.783,-4.45 -23.5,-4.733 -23.5,-6.667 -23.546,-6.713 -23.546,-6.996 -24.173,-7.623 -24.173,-9.27 -24.29,-9.387 -24.29,-13.605 -23.865,-14.03 R111.2@-23.865,-16
NetR112_1: R112.1 U13.7 | length 2.6
  Top Layer w0.254: R112.1@-19.565,-33 -19.565,-32.79 -19.192,-32.417 -18.728,-32.417 -18.536,-32.225 U13.7@-17.37,-32.225
NetR114_1: R114.1 U3.43 U13.4 | length 31.9
  Top Layer w0.254: U3.43@-24.67,-3.95 -23.565,-3.95 -22.992,-4.523 -22.992,-7.225 -23.446,-7.679 -23.446,-13.601 -21.223,-15.823 -21.223,-17.469 -21.583,-17.829 -21.583,-28.192 -20.71,-29.065 R114.1@-20.5,-29.065 -20.29,-29.065 -19.08,-30.275 U13.4@-17.37,-30.275
NetR119_2: R119.2 U3.22 | length 40.4
  Top Layer w0.254: U3.22@-17.75,2.97 -17.75,5.882 -15.367,8.265 -12.8,8.265 -12.139,8.925 -9.922,8.925 -7.391,11.455 13.755,11.455 15.2,12.9 R119.2@15.2,14.53
NetR120_2: R120.2 U3.23 | length 27
  Top Layer w0.254: U3.23@-18.25,2.97 -18.25,6.165 -15.597,8.819 -13.029,8.819 -12.369,9.479 -10.562,9.479 -8.031,12.009 0.402,12.009 1,12.608 R120.2@1,14.53
NetU3_49: U3.49 U13.3 | length 24.9
  Top Layer w0.254: U3.49@-22.75,-8.37 -22.75,-13.394 -21.007,-15.137 -20.669,-15.475 -20.669,-17.698 -21.029,-18.058 -21.029,-27.34 -20.232,-28.138 -19.613,-28.138 -19.363,-28.388 -19.363,-28.931 -18.669,-29.625 U13.3@-17.37,-29.625
NetU3_50: U3.50 U13.2 | length 24
  Top Layer w0.254: U3.50@-22.25,-8.37 -22.25,-13.111 -20.115,-15.245 -20.115,-17.928 -20.475,-18.288 -20.475,-27.111 -20.002,-27.584 -19.384,-27.584 -18.809,-28.159 -18.809,-28.702 -18.536,-28.975 U13.2@-17.37,-28.975
NetU3_51: U3.51 U13.1 | length 22.8
  Top Layer w0.254: U3.51@-21.75,-8.37 -21.75,-12.827 -19.561,-15.016 -19.561,-18.157 -19.921,-18.517 -19.921,-26.881 -19.773,-27.03 -19.154,-27.03 -18.255,-27.929 -18.255,-28.108 -18.106,-28.257 -17.438,-28.257 U13.1@-17.37,-28.325
NetU3_54: U3.54 U4.3 | length 37.5
  Top Layer w0.254: U3.54@-20.25,-8.37 -20.25,-11.977 -18.224,-14.003 -14.508,-17.719 -3.645,-17.719 -2.719,-18.645 -2.719,-27.9 -2.481,-28.138 -1.649,-28.138 cw(c-1.649,-28.223) -1.588,-28.163 -1.363,-28.388 -1.363,-28.798 -0.536,-29.625 U4.3@0.63,-29.625
NetU3_55: U3.55 U4.2 | length 36.3
  Top Layer w0.254: U3.55@-19.75,-8.37 -19.75,-11.693 -17.994,-13.449 -14.278,-17.165 -3.416,-17.165 -2.165,-18.416 -2.165,-27.414 ccw(c-2.114,-27.414) -2.15,-27.45 -2.031,-27.569 ccw(c-1.995,-27.533) -1.995,-27.584 -1.447,-27.584 cw(c-1.447,-27.737) -1.339,-27.629 -0.809,-28.159 -0.809,-28.441 -0.303,-28.947 0.602,-28.947 U4.2@0.63,-28.975
NetU3_56: U3.56 U4.1 | length 35.1
  Top Layer w0.254: U3.56@-19.25,-8.37 -19.25,-11.41 -17.765,-12.895 -14.083,-16.577 -3.22,-16.577 -1.769,-18.029 cw(c-2.149,-18.409) -1.611,-18.409 -1.611,-26.86 ccw(c-1.56,-26.86) -1.596,-26.896 -1.477,-27.015 ccw(c-1.441,-26.979) -1.441,-27.03 -1.154,-27.03 -0.255,-27.929 -0.255,-28.108 -0.106,-28.257 0.562,-28.257 U4.1@0.63,-28.325
OSC_IN: C7.2 U3.10 Y1.1 | length 16.5
  Top Layer w0.254: U3.10@-13.33,-1.95 -6.95,-1.95 -5.9,-3 -5.9,-7.277 -4.977,-8.2 -2.436,-8.2 C7.2@-2.1,-8.536
OSC_OUT: C6.2 U3.11 Y1.2 | length 16.7
  Top Layer w0.254: U3.11@-13.33,-1.45 -6.958,-1.45 -6.95,-1.442 -6.942,-1.442 -5.967,-0.467 -5.967,2.983 Y1.2@-5.9,3.05 -5.9,4.213 -4.977,5.136 C6.2@-2.1,5.136
power_ENC_1: JP?.2@-50,-9.9 P6.2 | length 6.3
  Top Layer w0.5: P6.2@-55.565,-11.805 -53.85,-10.09 cw(c-53.391,-10.55) -53.391,-9.9 JP?.2@-50,-9.9
power_ENC_2: JP?.2@-50,-0.9 P12.2 | length 6.3
  Top Layer w0.5: P12.2@-55.565,-2.805 -53.85,-1.091 cw(c-53.391,-1.55) -53.391,-0.9 JP?.2@-50,-0.9
power_ENC_3: JP?.2@-50,-27.9 P5.2 | length 6.3
  Top Layer w0.5: P5.2@-55.565,-29.805 -53.85,-28.091 cw(c-53.391,-28.55) -53.391,-27.9 JP?.2@-50,-27.9
power_ENC_4: JP?.2@-50,-18.9 P11.2 | length 6.3
  Top Layer w0.5: P11.2@-55.565,-20.805 -53.851,-19.091 cw(c-53.391,-19.55) -53.391,-18.9 JP?.2@-50,-18.9
RX: J2.02 U3.26 | length 8.4
  Top Layer w0.254: U3.26@-19.75,2.97 -19.75,7.667 -19.4,8.017 J2.02@-19.4,11.2
SCL: EEPROM1.5 R6.1 U3.30 | length 13.8
  Top Layer w0.254: R6.1@-29.635,4.6 -29.947,4.912 -29.947,6.166 -29.219,6.894 -29.219,7.518 -29.07,7.666 -28.078,7.666 EEPROM1.5@-28.023,7.722 -24.922,7.722 -21.75,4.55 U3.30@-21.75,2.97
SDA: EEPROM1.4 R7.1 U3.31 | length 7.9
  Top Layer w0.254: EEPROM1.4@-28.023,6.452 -25.9,6.441 -24.535,6.435 -22.25,4.15 U3.31@-22.25,2.97
SWDCLK: J3.03 R4.1 U3.46 | length 11.8
  Top Layer w0.254: J3.03@-32.874,-5.2 -31.171,-6.903 ccw(c-30.937,-6.668) -30.937,-7 -29.73,-7 ccw(c-29.73,-6.97) -29.7,-6.97 -29.199,-6.469 -26.741,-6.469 -26.273,-6.001 -26.273,-5.999 -25.724,-5.45 U3.46@-24.67,-5.45 ; R4.1@-29.7,-9.23 -29.7,-7
SWDIO: J3.02 U3.45 | length 6.9
  Top Layer w0.254: J3.02@-30.327,-5.193 -29.053,-3.919 -26.736,-3.919 -26.513,-4.142 -26.513,-4.587 -26.15,-4.95 U3.45@-24.67,-4.95
TX: J2.03 U3.25 | length 9.2
  Top Layer w0.254: U3.25@-19.25,2.97 -19.25,7.217 -16.86,9.607 J2.03@-16.86,11.2
VCP1: C15.1 U4.12 | length 6.1
  Top Layer w0.254: U4.12@6.37,-30.925 8.481,-30.925 8.788,-30.618 11.002,-30.618 11.82,-29.8 C15.1@12,-29.8
VCP2: C28.1 U13.12 | length 6.1
  Top Layer w0.254: U13.12@-11.63,-30.925 -9.519,-30.925 -9.212,-30.618 -6.998,-30.618 -6.18,-29.8 C28.1@-6,-29.8
pads on no net: K1.2 K2.2 K3.2 K4.2 U3.5

## Polygon pours and split planes (outlines as drawn)
GND on Bottom Layer "NONET_L-01_P-001" (solid, remove dead copper, pour order 15): -58.9,41 -58.9,-41.4 25.01,-41.4 25.01,41
GND on Bottom Layer "NONET_L-01_P-001" (solid, remove dead copper, pour order 1): -6.5,-20.6 -6.5,-40.6 13.5,-40.6 13.5,-20.6
GND on Bottom Layer "NONET_L-01_P-001" (solid, remove dead copper, pour order 4): -25.654,3.937 -12.319,3.937 -12.319,-9.398 -25.654,-9.398
GND on Bottom Layer "NONET_L-01_P-001" (solid, remove dead copper, pour order 0): -24.5,-20.6 -24.5,-40.6 -4.5,-40.6 -4.5,-20.6
GND on Top Layer "NONET_L-01_P-001" (solid, remove dead copper, pour order 16): -58.9,36.5 -58.9,-41.4 30.1,-41.4 30.1,36.5
GND on Top Layer "NONET_L-01_P-001" (solid, remove dead copper, pour order 5): -25.654,3.937 -12.319,3.937 -12.319,-9.398 -25.654,-9.398
GND on Top Layer "NONET_L-01_P-001" (solid, remove dead copper, pour order 14): -6.5,-20.6 -6.5,-40.6 13.5,-40.6 13.5,-20.6
GND on Top Layer "NONET_L-01_P-001" (solid, remove dead copper, pour order 13): -24.5,-20.6 -24.5,-40.6 -4.5,-40.6 -4.5,-20.6
jack_extend2 on Top Layer "NONET_L-01_P-001" (solid, remove dead copper, pour order 12): -18.4,-32.875 -18.4,-39.5 -15.4,-39.5 -15.4,-32.875
jack_retract2 on Top Layer "NONET_L-01_P-001" (solid, remove dead copper, pour order 11): -13.6,-39.4 -13.6,-36.8 -11.63,-36.8 -11.63,-32.6 -12.5,-32.6 -12.5,-31.9 -9.5,-31.9 -9.5,-39.4
jack_retract1 on Top Layer "NONET_L-01_P-001" (solid, remove dead copper, pour order 9): 4.4,-39.4 4.4,-36.8 6.37,-36.8 6.37,-32.6 5.5,-32.6 5.5,-31.9 8.5,-31.9 8.5,-39.4
jack_extend1 on Top Layer "NONET_L-01_P-001" (solid, remove dead copper, pour order 8): -0.4,-32.875 -0.4,-39.5 2.6,-39.5 2.6,-32.875

## Other copper
Top Layer:
  pour cut-out: 18.9,42.1 -40.1,42.1 -40.1,16.3 18.9,16.3
Bottom Layer:
  pour cut-out: 17.7,42.1 -40.1,42.1 -40.1,16.3 17.7,16.3

## Silkscreen, mask and mechanical layers (free items; w line width, h text height)
Mechanical 1:
  the board outline again, w0.1

## Text inside footprints (layer, text, board x,y; h text height)
*1: Top Overlay "mp1584 module" at -39.7,-12.873 h1.52 r270
D1: Bottom Overlay "+" at -42.7,-29.55 h0.89 r180
D4: Bottom Overlay "+" at 31.4,38.025 h0.89 r180
D5: Bottom Overlay "+" at 31.4,32.945 h0.89 r180
D6: Bottom Overlay "+" at 31.4,27.865 h0.89 r180
D7: Bottom Overlay "+" at 31.4,22.785 h0.89 r180
D8: Bottom Overlay "+" at 31.4,17.705 h0.89 r180
D9: Bottom Overlay "+" at 31.4,12.625 h0.89 r180
D10: Bottom Overlay "+" at 31.4,7.545 h0.89 r180
D11: Bottom Overlay "+" at 31.4,2.465 h0.89 r180
D12: Bottom Overlay "+" at 31.4,-2.615 h0.89 r180
D13: Bottom Overlay "+" at 31.4,-7.695 h0.89 r180
D14: Bottom Overlay "+" at 31.4,-12.775 h0.89 r180
D15: Bottom Overlay "+" at 31.4,-17.855 h0.89 r180
D16: Bottom Overlay "+" at 31.4,-22.935 h0.89 r180
D17: Bottom Overlay "+" at 31.4,-28.015 h0.89 r180
D18: Bottom Overlay "+" at 25.8,-33.995 h0.89
D19: Bottom Overlay "+" at 31.4,-38.175 h0.89 r180
D20: Top Overlay "+" at 36.5,16.805 h0.89
D21: Top Overlay "+" at 36.5,37.125 h0.89
D22: Top Overlay "+" at 36.5,26.965 h0.89
D23: Top Overlay "+" at 36.5,6.645 h0.89
D24: Top Overlay "+" at 36.5,-33.995 h0.89
D25: Top Overlay "+" at 36.5,-13.675 h0.89
D26: Top Overlay "+" at 36.5,-23.835 h0.89
D27: Top Overlay "+" at 36.5,-3.515 h0.89
SW1: Bottom Overlay "A" at 14,-7.7 h1; Bottom Overlay "B" at 5.7,-7.7 h1; Bottom Overlay "C" at 9.9,-5.7 h1; Bottom Overlay "D" at 13.9,7.3 h1; Bottom Overlay "E" at 5.7,7.4 h1